# Altium PCB PCB1_Drone - copia.PcbDoc
Units mm, origin at the board's own origin, x right, y up, seen from the top; angles counter-clockwise.
Board outline 75.4 x 71.13 mm, 2 copper layers (Top Layer, Bottom Layer); 15 components, 11 nets, 51 pads, 4 vias.
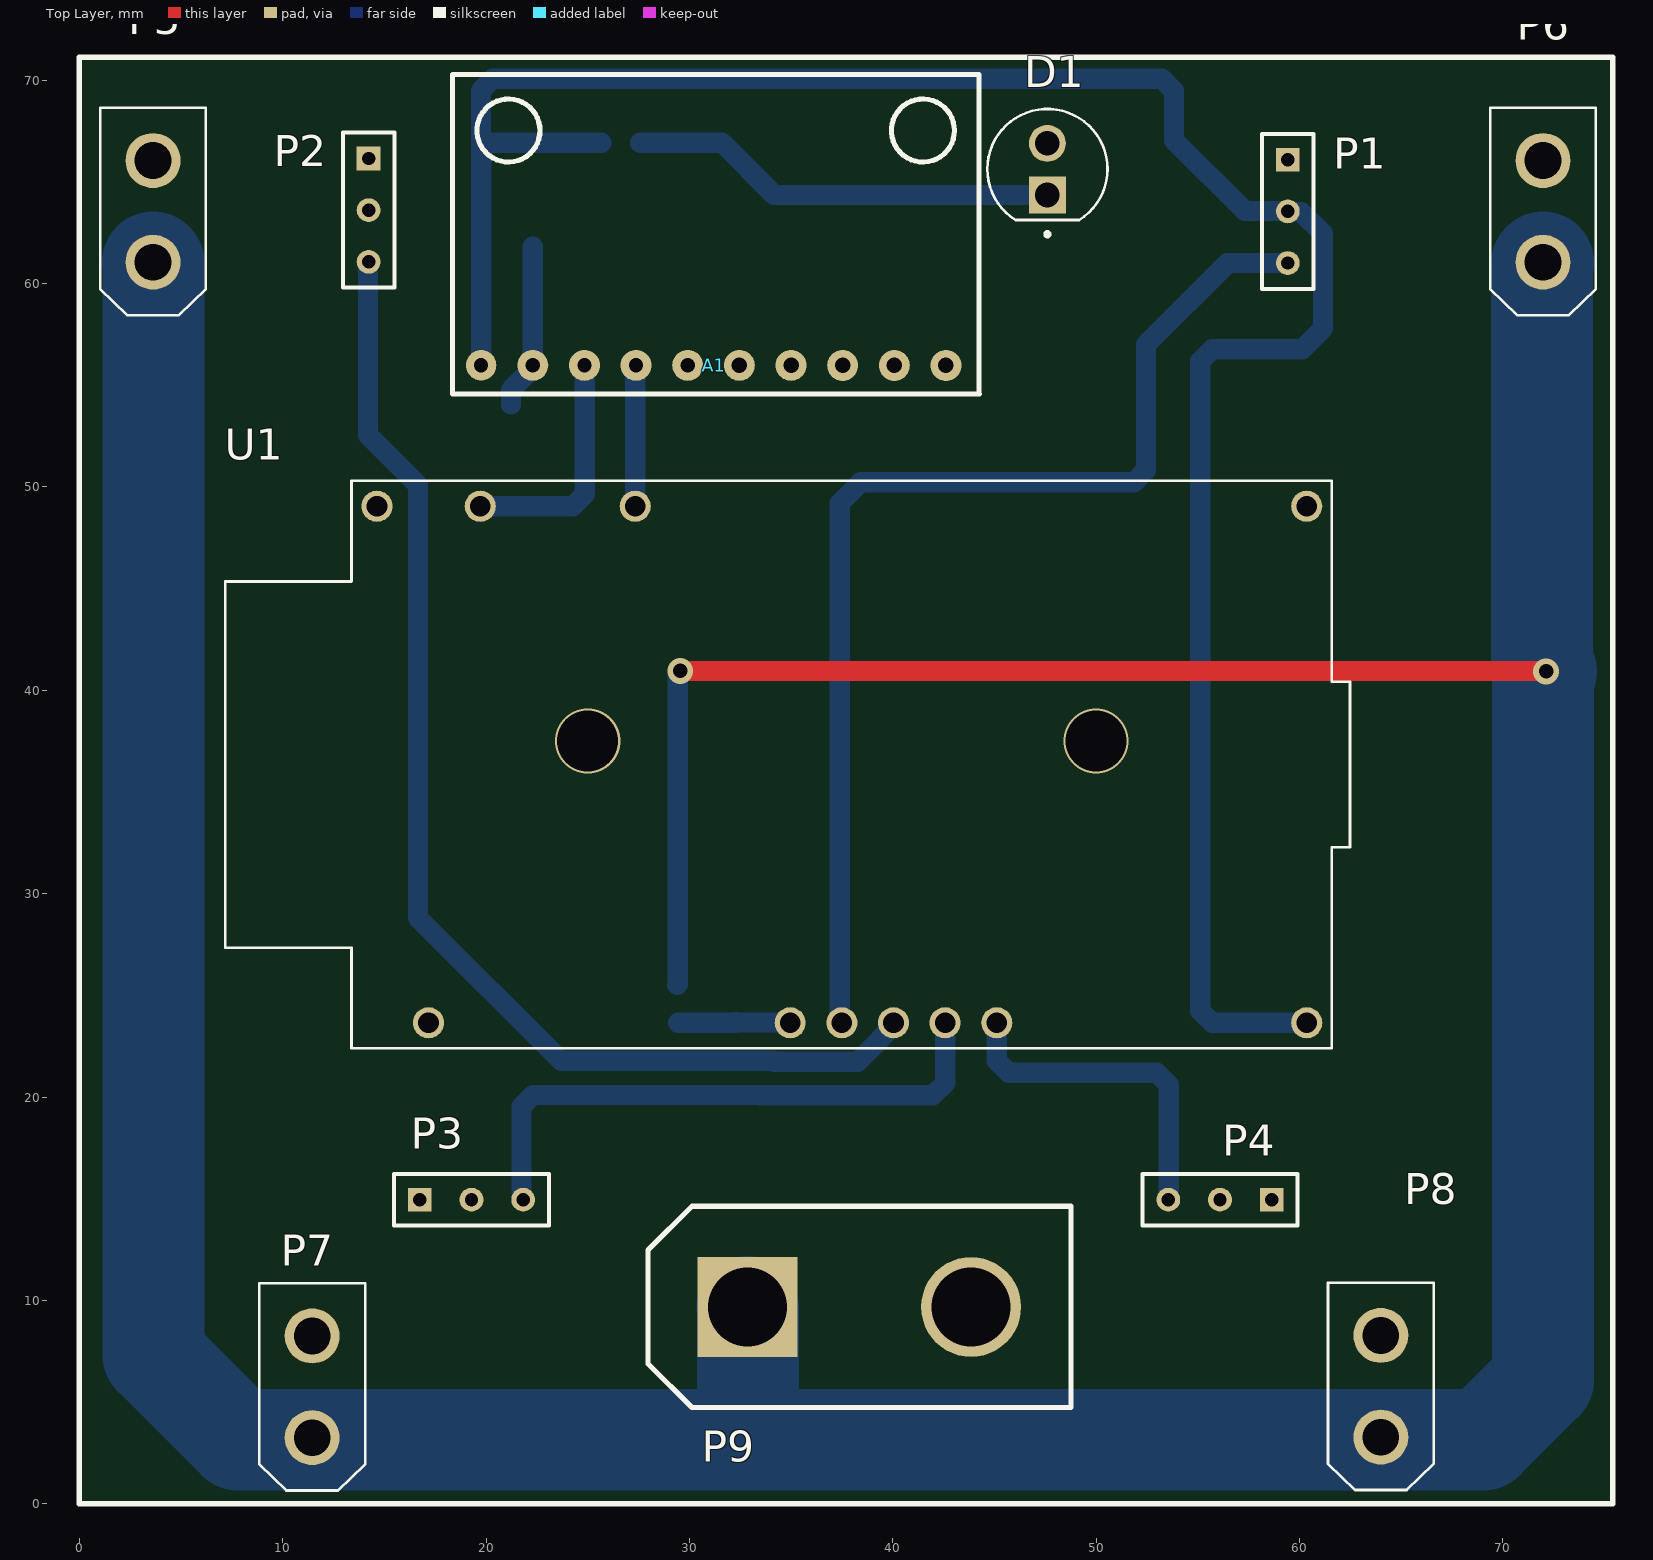
[diagram p0: Top Layer view]
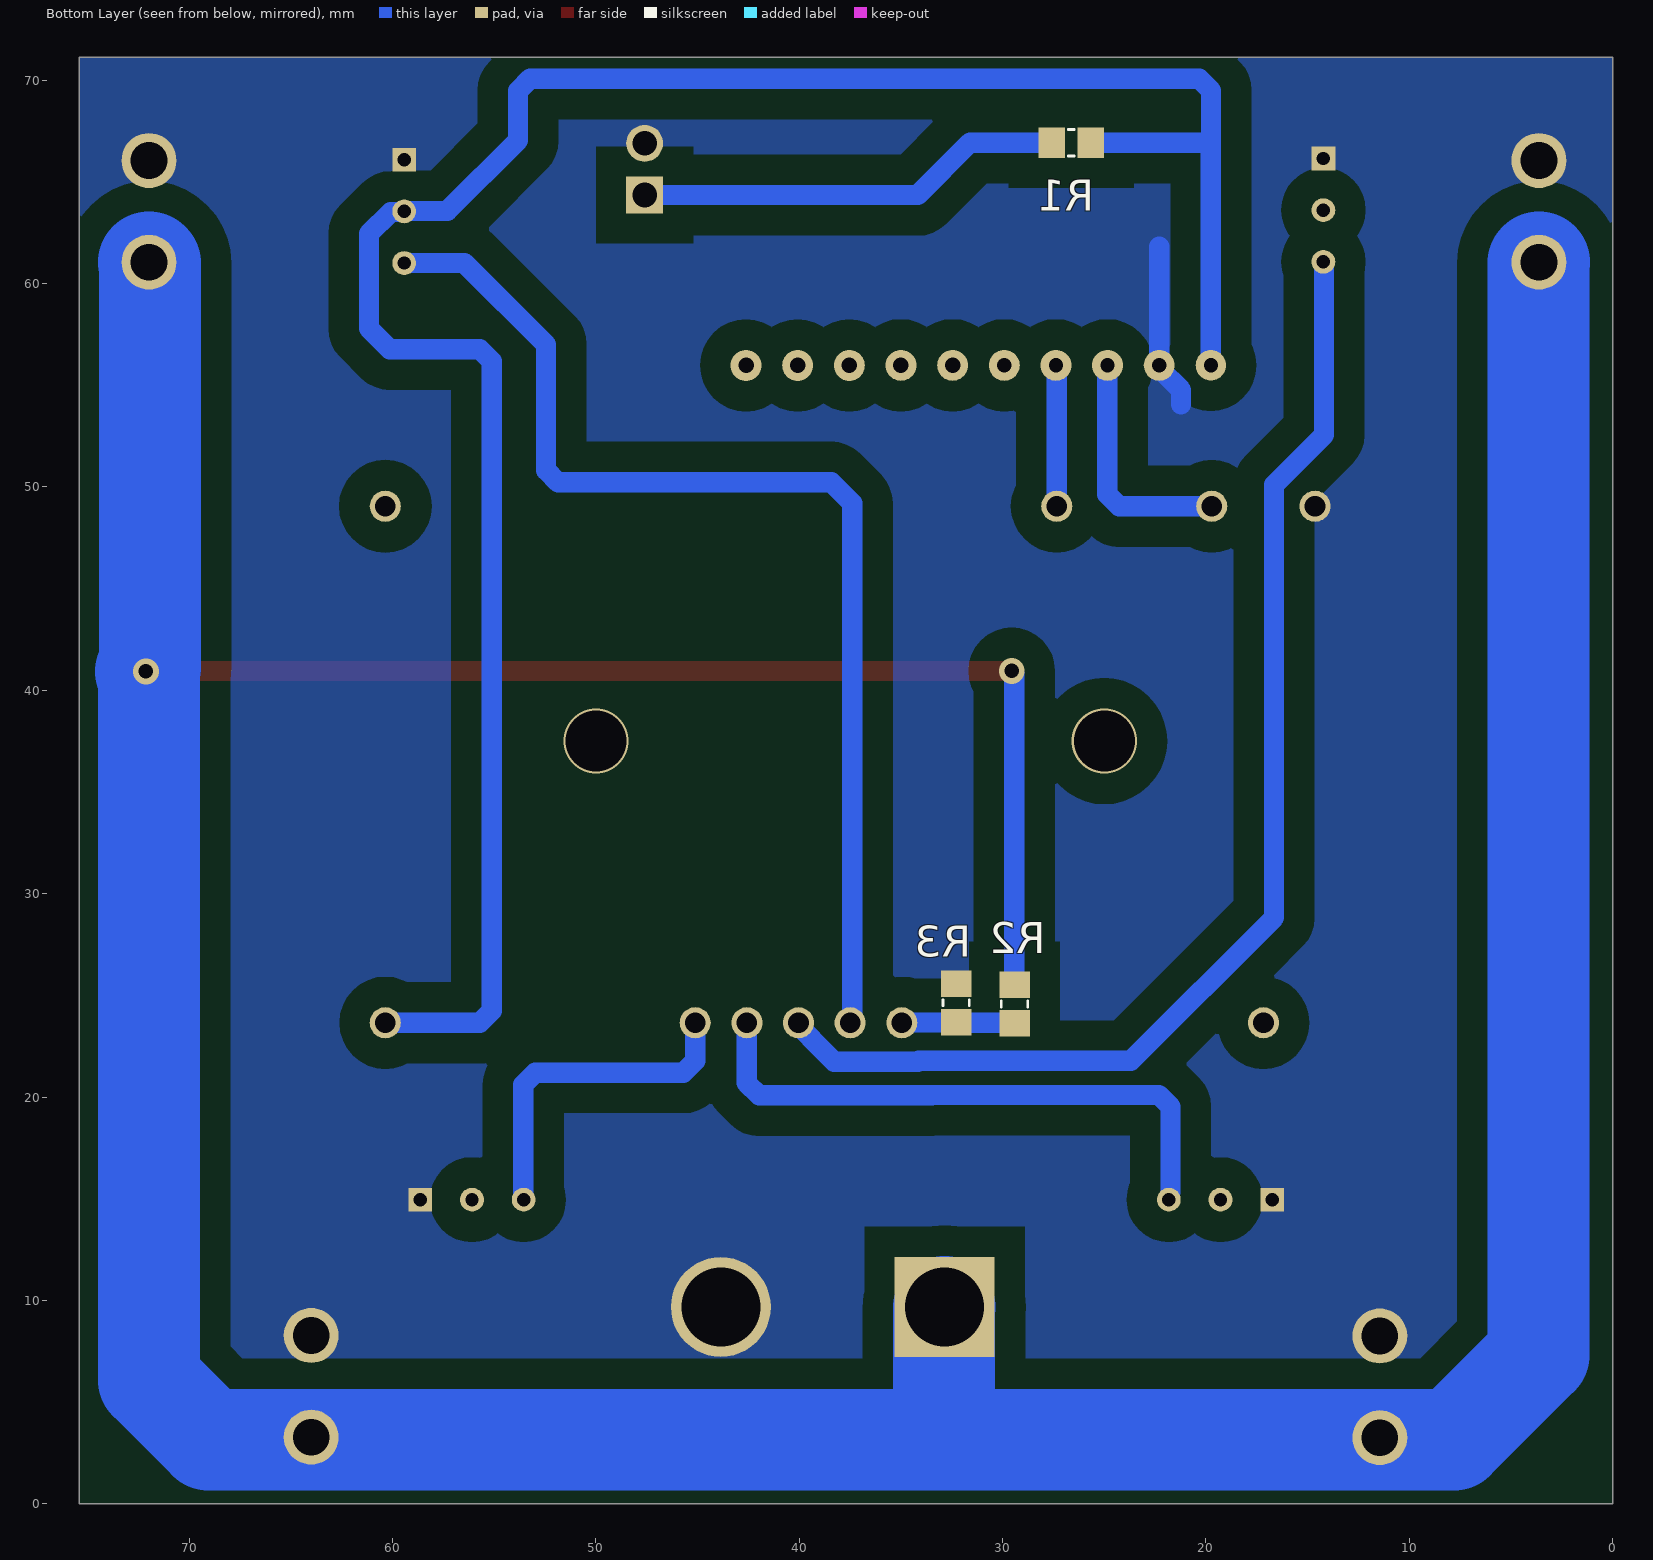
[diagram p1: Bottom Layer view, seen from below]

## Layer stack, top to bottom
Top Solder: solder mask 0.0102, Solder Resist, Dk 3.5
Top Layer: signal copper 0.0356
Dielectric 1: dielectric 0.32, FR-4, Dk 4.8
Bottom Layer: signal copper 0.0356
Bottom Solder: solder mask 0.0102, Solder Resist, Dk 3.5

## Board outline
0,0 0,71.125 75.4,71.125 75.4,0

## Design rules (kind name [scope] priority, off if disabled: settings)
Clearance [All] p1: gap=0.65 ignorepadtopadclearanceinfootprint=TRUE except(1.5: Arc-Poly Track-Poly SMDPad-Poly THPad-Poly Via-Poly Fill-Poly Poly-Poly)
PlaneConnect [All] p1: planeconnectstyle=Direct reliefexpansion=0.508 reliefentries=4 reliefconductorwidth=0.254 reliefairgap=0.254
PolygonConnect [All] p1: connectstyle=Direct reliefconductorwidth=0.254 reliefentries=4 polygonreliefangle="90 Angle" airgapwidth=0.254
RoutingVias [All] p1: holewidth=0.711 width=1.27 viastyle="Through Hole" minholewidth=0.711 minwidth=1.27 maxholewidth=0.711 maxwidth=1.27
SolderMaskExpansion [All] p1: expansion=0.102 istentingtop=FALSE
Width [All] p1: maxlimit=5 minlimit=0.7 preferedwidth=1
29 further rules are at their usual default settings.

## Components (designator, comment, footprint, x,y, rotation, side; value= is the part's Value field where it differs from the comment)
A1 "HW123_Acelerator" HW123_ACELEROMETER 18.352,54.575 r90 top
D1 "LED1" LEDRD254W57D500H1070 47.602,65.625 r90 top
P1 "MHDR1X3" SAMTEC_BBS-102-X-X 59.425,64.82 r270 top
P2 "MHDR1X3" SAMTEC_BBS-102-X-X 14.225,64.88 r270 top
P3 "MHDR1X3" SAMTEC_BBS-102-X-X 18.015,14.95 r0 top
P4 "MHDR1X3" SAMTEC_BBS-102-X-X 57.36,14.95 r180 top
P5 "MHDR1X2" XT30UPB-M 3.625,63.55 r270 top
P6 "MHDR1X2" XT30UPB-M 71.975,63.55 r270 top
P7 "MHDR1X2" XT30UPB-M 11.45,5.75 r270 top
P8 "MHDR1X2" XT30UPB-M 64,5.775 r270 top
P9 "MHDR1X2" AMASS_XT90PW-M 27.97,4.725 r90 top
R1 "Res1" CAPC2012X135N 26.625,66.925 r0 bottom value=1K
R2 "Res1" CAPC2012X135N 29.41,24.57 r270 bottom value=3K
R3 "Res1" CAPC2012X135N 32.282,24.63 r90 bottom value=1K
U1 "*" MODULE_ESP32-DEVKITC 37.485,36.35 r90 top

## Footprints (in the part's own frame and the unit in brackets; to place one, negate y for a bottom-side part, rotate by r counter-clockwise, add the part's x,y. Pads: shape width x height; smd on the part's side, far side on the other; paste and mask are expansions set on the pad)
AMASS_XT90PW-M [mm]
  rect 4.916x4.916 / inner round 4.916 / far side rect 4.916x4.916 hole 3.9: 1(4.95,-4.884)
  round 4.916 hole 3.9: 2(4.95,-15.88)
  silkscreen extent 0,-20.8 9.9,0
CAPC2012X135N [mm]
  rect 1.3x1.5 smd: 1(-0.95,0) 2(0.95,0)
  silkscreen extent -0.15,-0.65 0.15,0.65
HW123_ACELEROMETER [mm]
  round 1.5 hole 0.7: 1(1.405,-1.405)
  round 1.524 hole 0.7: 2(1.405,-3.945) 3(1.405,-6.485) 4(1.405,-9.025) 5(1.405,-11.565)
  round 1.524 hole 0.762: 6(1.405,-14.105) 7(1.405,-16.645) 8(1.4,-19.185) 9(1.4,-21.725) 10(1.4,-24.265)
  silkscreen extent 0,-25.91 15.7,0
LEDRD254W57D500H1070 [mm]
  rect 1.815x1.815 / inner round 1.815 / far side rect 1.815x1.815 hole 1.21: 1(-1.27,0)
  round 1.815 hole 1.21: 2(1.27,0)
  silkscreen extent -3.3,-2.96 2.96,2.96, body extent -2.6,-2.95 2.95,2.95, height 9.1
MODULE_ESP32-DEVKITC [mm]
  round 1.53 hole 1.02: 2(-12.7,20.31) 9(-12.7,2.53) 10(-12.7,-0.01) 11(-12.7,-2.55) 12(-12.7,-5.09) 13(-12.7,-7.63) 19(-12.7,-22.87) 33(12.7,10.15) 36(12.7,17.77) 38(12.7,22.85)
  silkscreen extent -13.95,-25 13.95,30.3
SAMTEC_BBS-102-X-X [mm]
  rect 1.168x1.168 hole 0.66: 1(-1.27,0)
  round 1.168 hole 0.66: 2(1.27,0) 3(3.81,0)
  silkscreen extent -2.54,-1.27 5.08,1.27
XT30UPB-M [mm]
  round 2.7 hole 1.8: 1(-2.5,0) 2(2.5,0)
  silkscreen extent -5.1,-2.6 5.1,2.6

## Part data
D1: "Typical RED GaAs LED", LatestRevisionDate=08-Jul-2005, LatestRevisionNote="Mech Layer 1 removed.", PackageDescription="LED; 2 Leads", PackageReference=LED-1, Published=8-Jun-2000, Publisher="Altium Limited"
P1 P2 P3 P4: "Header, 3-Pin", LatestRevisionDate=17-Jul-2002, LatestRevisionNote="Re-released for DXP Platform.", Publisher="Altium Limited"
P5 P6 P7 P8 P9: "Header, 2-Pin", LatestRevisionDate=17-Jul-2002, LatestRevisionNote="Re-released for DXP Platform.", Publisher="Altium Limited"
R1 R2 R3: "Resistor", LatestRevisionDate=17-Jul-2002, LatestRevisionNote="Re-released for DXP Platform.", PackageDescription="Axial Device, Thru-Hole; 2 Leads; 0.3 in Pin Spacing", PackageReference=AXIAL-0.3, Published=8-Jun-2000, Publisher="Altium Limited"
U1: library part ESP32-DEVKITC, "- Transceiver; 802.11 b/g/n _Wi-Fi, WiFi, WLAN_, BluetoothÂ® Smart Ready 4.x Dual Mode For Use With ESP-WROOM-32", Package=None, Availability=Unavailable, MF="Espressif Systems", MP=ESP32-DEVKITC-32D-F, Price=None, SnapEDA_Link=https://www.snapeda.com/parts/ESP32-DEVKITC-32D-F/Espressif%20Systems/view-part/4220172/?ref=snap

## Free pads (board coordinates)
  round 1.53 hole 1.02: 3(60.355,49.05)

## Via types
v1: diameter 1.27, hole 0.711, Top Layer to Bottom Layer, 2 vias
v2: diameter 3.2, hole 3, Top Layer to Bottom Layer, 2 vias

## Nets (pads, with @x,y where several pads share a name; then routed paths per layer and width w, separated by ;. In a path a pad name is that pad's centre, name@x,y a point inside that pad or via, vN(x,y) a via of type N, cw(c..) or ccw(c..) an arc to the next point about the centre after c; other vN are vias at no path point)
+12: P5.2 P6.2 P7.2 P8.2 P9.1 R2.1 | length 244.9
  Top Layer w1: v1(29.552,40.95) 72.1,40.95 v1(72.125,40.925)
  Bottom Layer w1: R2.1 29.431,25.541 29.431,40.829 v1(29.552,40.95)
  Bottom Layer w5: P5.2 3.65,61.025 3.65,7.304 7.804,3.15 33.275,3.15 ; P9.1 32.884,9.645 32.884,3.541 33.275,3.15 ; v1@71.975,40.925 71.975,6.079 69.046,3.15 64,3.15 33.275,3.15 ; P6.2 71.925,61 71.925,41.125 v1(72.125,40.925)
A: P4.3 U1.13 | length 16.5
  Bottom Layer w1: U1.13 45.115,21.786 45.701,21.2 52.979,21.2 53.565,20.614 P4.3@53.565,14.95
B: P3.3 U1.12 | length 28.5
  Bottom Layer w1: P3.3@21.74,15.325 21.74,15.975 21.74,19.514 22.326,20.1 33.463,20.1 33.478,20.085 41.974,20.085 42.575,20.686 U1.12
C: P2.3 U1.11 | length 60.5
  Bottom Layer w1: P2.3 14.194,61.039 14.194,52.57 16.652,50.112 16.652,28.825 23.702,21.775 34.122,21.775 34.162,21.735 38.288,21.735 39.41,22.857 39.41,22.882 40.035,23.507 U1.11
D: P1.3 U1.10 | length 56.1
  Bottom Layer w1: U1.10 37.394,23.751 37.394,49.192 38.427,50.225 51.864,50.225 52.45,50.811 52.45,57 56.46,61.01 P1.3
GND: A1.2 D1.2 P1.1 P2.1 P3.1 P4.1 P5.1 P6.1 P7.1 P8.1 P9.2 R3.2 U1.38 | length 8.2
  Bottom Layer w1: 21.225,54.05 21.225,54.766 22.274,55.816 22.274,55.958 A1.2 22.297,61.803
NetA1_3: A1.3 U1.36 | length 11.7
  Bottom Layer w1: U1.36 24.266,49.05 24.852,49.636 24.852,55.965 A1.3
NetA1_4: A1.4 U1.33 | length 6.9
  Bottom Layer w1: U1.33 27.344,49.058 27.344,55.947 A1.4
NetD1_1: D1.1 R1.2 | length 21.1
  Bottom Layer w1: R1.2 31.605,66.925 34.175,64.355 D1.1
P25: R2.2 R3.1 U1.9 | length 5.5
  Bottom Layer w1: R2.2@29.44,23.65 R3.1@32.252,23.65 ; R3.1 32.297,23.665 34.94,23.665 U1.9
VCC: A1.1 P1.2 R1.1 U1.19 | length 114.5
  Bottom Layer w1: A1.1 19.757,66.925 ; R1.1 19.757,66.925 ; U1.19 55.711,23.65 55.125,24.236 55.125,56.189 55.711,56.775 60.139,56.775 61.159,57.795 61.159,62.446 60.087,63.518 59.457,63.518 59.403,63.572 57.296,63.572 53.825,67.044 53.825,69.489 53.239,70.075 20.336,70.075 19.75,69.489 19.75,66.932 19.757,66.925
pads on no net: A1.5 A1.6 A1.7 A1.8 A1.9 A1.10 P2.2 P3.2 P4.2 U1.2
copper on no net:
  other v2: 25,37.5 50,37.5

## Polygon pours and split planes (outlines as drawn)
GND on Bottom Layer "GND_L02_P000" (solid, remove dead copper, pour order 0): 0,71.125 75.4,71.125 75.4,0 0,0

## Silkscreen, mask and mechanical layers (free items; w line width, h text height)
Top Overlay:
  the board outline again, w0.254